# Altium PCB Onboard+Plate+ver1 (altium designer.).pcbdoc
Units mm, origin at the board's own origin, x right, y up, seen from the top; angles counter-clockwise.
Board outline 102.36 x 175.4 mm, 2 copper layers (Top Layer, Bottom Layer); 19 components, 31 nets, 98 pads, 0 vias.
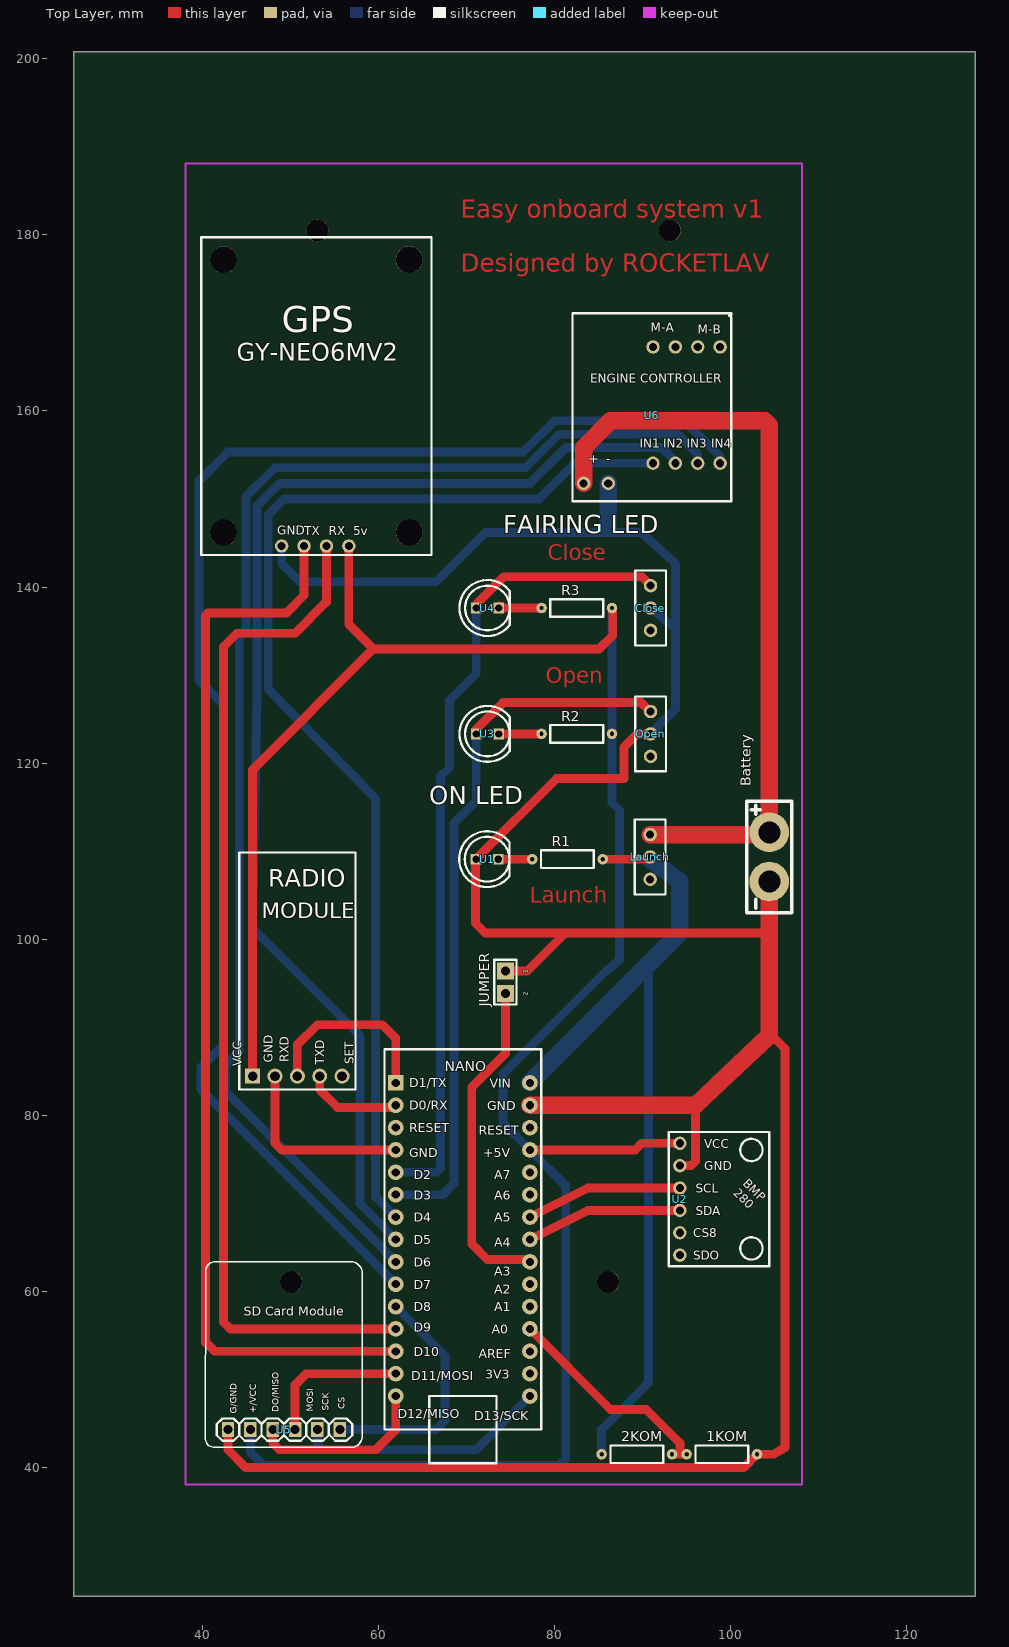
[diagram p0: Top Layer view]
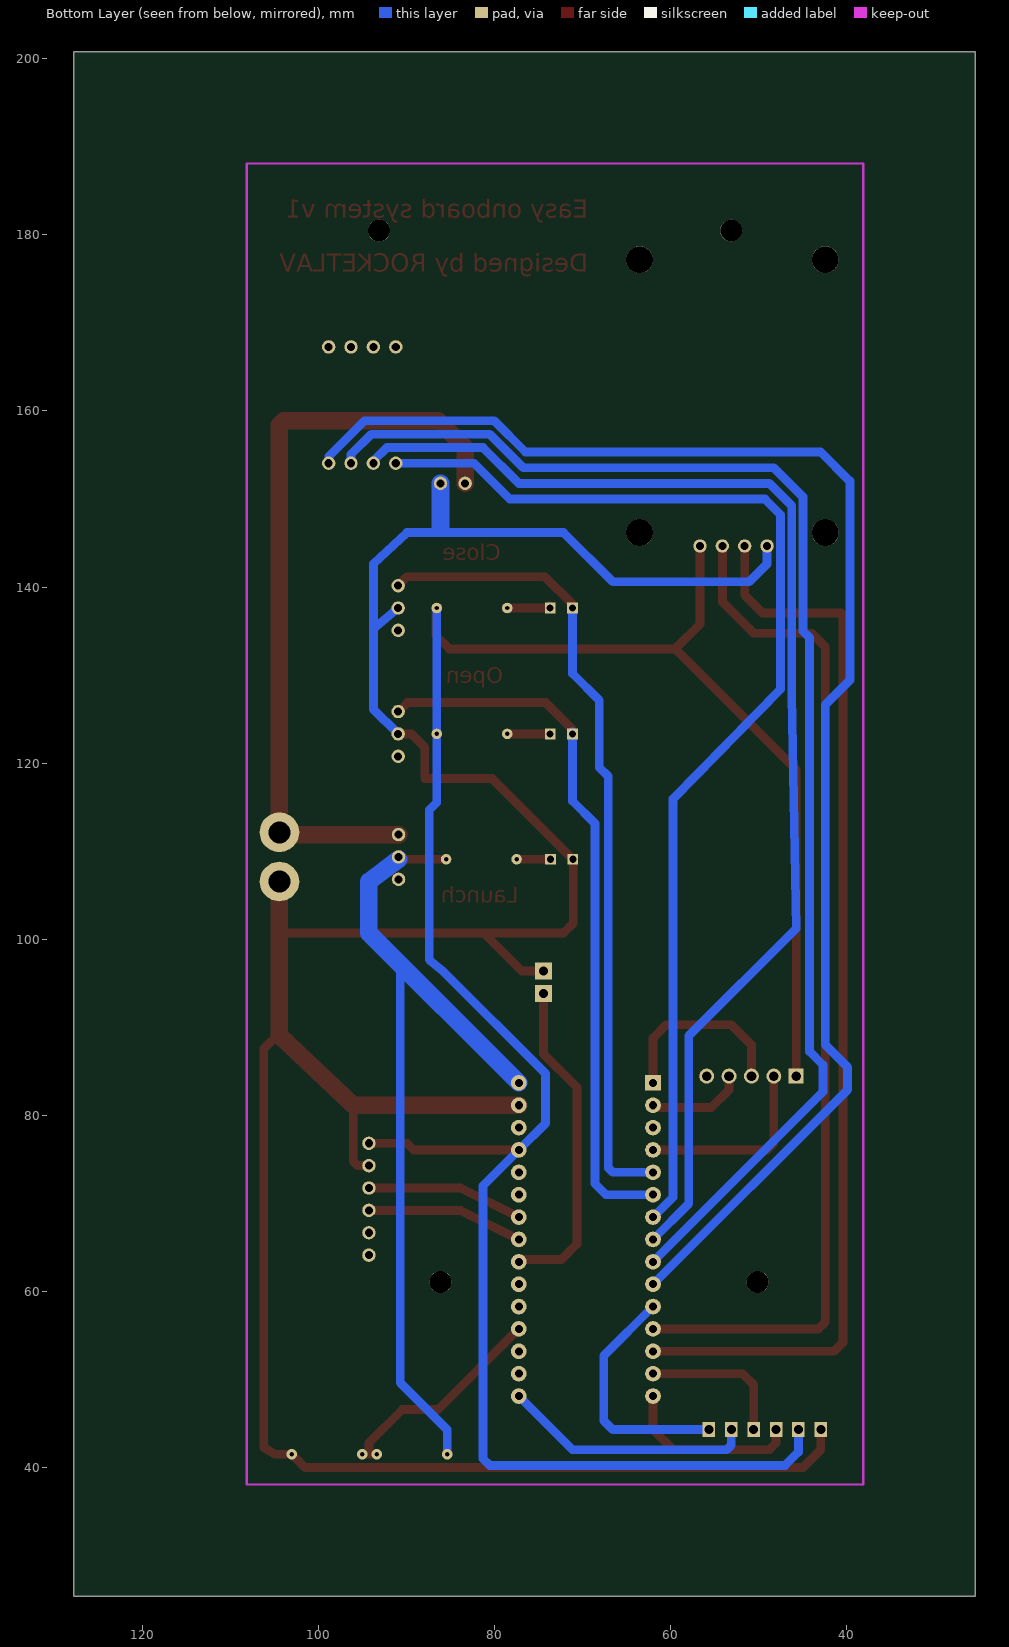
[diagram p1: Bottom Layer view, seen from below]

## Layer stack, top to bottom
Top Layer: signal copper (thickness not stored)
Dielectric: dielectric 0.32, FR-4, Dk 4.8
Bottom Layer: signal copper (thickness not stored)

## Board outline
127.762,25.4 25.4,25.4 25.4,200.8 127.762,200.8

## Components (designator, comment, footprint, x,y, rotation, side; value= is the part's Value field where it differs from the comment)
1KOM "_" ?#1 99.06,41.542 r0 top
2KOM "_" ?#1 89.408,41.542 r0 top
Battery "_" ?#2 106.934,115.71 r270 top
Close "_" ?#3 90.912,137.624 r0 top
GPS "GY_NEO6MV2_PACKAGE" GY_NEO6MV2_PACKAGE 52.832,161.938 r90 top
JUMPER "JUMPER2" JUMPER2 74.422,93.866 r90 top
Launch "_" ?#3 90.868,109.359 r0 top
NANO "ARDUINO_NANO" ARDUINO_NANO 69.596,65.926 r0 top
Open "_" ?#3 90.912,123.329 r0 top
R1 "_" ?#1 81.534,109.106 r0 top
R2 "_" ?#1 82.593,123.33 r0 top
R3 "_" ?#1 82.593,137.625 r0 top
RADIO "HC12" HC12 45.72,84.468 r90 top
U1 "LED-5MM" LED-5MM 72.348,109.106 r0 top
U2 "_" ?#4 104.394,78.118 r180 top
U3 "LED-5MM" LED-5MM 72.391,123.33 r0 top
U4 "LED-5MM" LED-5MM 72.391,137.625 r0 top
U5 "_" ?#5 58.166,42.304 r90 top
U6 "MX1508" MX1508 100.076,163.208 r270 top

## Footprints (in the part's own frame and the unit in brackets; to place one, negate y for a bottom-side part, rotate by r counter-clockwise, add the part's x,y. Pads: shape width x height; smd on the part's side, far side on the other; paste and mask are expansions set on the pad)
ARDUINO_NANO [mil]
  rect 70x70 hole 36: 1(-300,700)
  round 70 hole 36: 2(-300,600) 3(-300,500) 4(-300,400) 5(-300,300) 6(-300,200) 7(-300,100) 8(-300,0) 9(-300,-100) 10(-300,-200) 11(-300,-300) 12(-300,-400) 13(-300,-500) 14(-300,-600) 15(-300,-700) 16(300,-700) 17(300,-600) 18(300,-500) 19(300,-400) 20(300,-300) 21(300,-200) 22(300,-100) 23(300,0) 24(300,100) 25(300,200) 26(300,300) 27(300,400) 28(300,500) 29(300,600) 30(300,700)
  silkscreen extent -350,-1000 350,850
GY_NEO6MV2_PACKAGE [mil]
  round 60 hole 36: 1(-680,150) 2(-680,50) 3(-680,-50) 4(-680,-150)
  round 120 hole 120 unplated: ""(-620,-420) ""(-620,410) ""(600,-420) ""(600,410)
  silkscreen extent -720,-520 700,510
HC12 [mm]
  rect 1.7x1.7 hole 1.1: 1(0,0)
  round 1.7 hole 1.1: 2(0,-2.54) 3(0,-5.08) 4(0,-7.62) 5(0,-10.16)
  silkscreen extent -1.52,-11.68 25.4,1.52
JUMPER2 [mil]
  rect 76x76 hole 39.4: 1(100,0) 2(0,0)
  silkscreen extent -50,-50 150,50
LED-5MM [mil]
  rect 47.7x47.7 hole 32: 1(-50,-0.05) 2(50,-0.05)
  silkscreen extent -125,-125 100,125
MX1508 [mil]
  round 60 hole 36: 1(-160,-350) 2(-160,-250) 3(-160,-150) 4(-160,-50) 5(360,-350) 6(360,-250) 7(360,-150) 8(360,-50) 9(450,-660) 10(450,-550)
  silkscreen extent -310,-710 530,0
?#1 [mm]
  round 1.199 hole 0.5: 1(-4.064,0) 2(3.937,0)
  silkscreen extent -3.06,-1 2.94,1
?#2 [mm]
  round 4.5 hole 2.5: 1(3.556,-2.54) 2(9.144,-2.54)
  silkscreen extent 0,-5.08 12.7,0
?#3 [mm]
  round 1.524 hole 0.914: 1(0,2.541) 2(0,0.001) 3(0,-2.539)
  silkscreen extent -1.75,-4.25 1.75,4.25
?#4 [mm]
  round 1.524 hole 0.914: 1(10.16,13.97) 2(10.16,11.43) 3(10.16,8.89) 4(10.16,6.35) 5(10.16,3.81) 6(10.16,1.27)
  silkscreen extent 0,0 11.43,15.24
?#5 [mm]
  rect 1.699x1.415 hole 1.016: 1(2.032,15.24) 2(2.032,12.7) 3(2.032,10.16) 4(2.032,7.62) 5(2.032,5.08) 6(2.032,2.54)
  Bottom Layer lines w0.406: 2.032,5.08 1.905,4.953
  silkscreen extent 0,0 21.08,17.84

## Free pads (board coordinates)
  round 2.5 hole 2.5 unplated: ""(50.099,61.1) ""(53.086,180.48) ""(86.101,61.1) ""(93.086,180.48)

## Nets (pads, with @x,y where several pads share a name; then routed paths per layer and width w, separated by ;. In a path a pad name is that pad's centre, name@x,y a point inside that pad or via, vN(x,y) a via of type N, cw(c..) or ccw(c..) an arc to the next point about the centre after c; other vN are vias at no path point)
CLK: NANO.15 U5.3 | length 20.6
  Top Layer w1: U5.3 48.006,42.812 48.768,42.05 59.69,42.05 61.976,44.336 NANO.15
CS: NANO.16 U5.5 | length 28.6
  Bottom Layer w1: U5.5 53.086,42.558 53.594,42.05 71.12,42.05 NANO.16
MISO: 1KOM.1 1KOM.2 2KOM.1 2KOM.2 Battery.1 Close.1 Close.2 GPS.1 GPS.4 JUMPER.1 Launch.1 Launch.2 NANO.5 NANO.6 NANO.19 NANO.25 NANO.26 NANO.27 NANO.30 Open.1 Open.2 R1.1 R1.2 R2.1 R2.2 R3.1 R3.2 RADIO.1 U1.1 U1.2 U2.6 U3.1 U3.2 U4.1 U4.2 U5.1 U5.2 U6.9 U6.10 | length 853.2
  Top Layer w1: U5.1 42.926,42.05 44.958,40.018 101.473,40.018 1KOM.2 ; RADIO.1 45.72,119.266 59.436,132.982 ; 56.642,140.856 56.642,135.776 59.436,132.982 ; U1.1@71.036,109.106 71.036,101.824 72.136,100.724 104.394,100.731 ; U1.1@71.079,109.106 80.223,118.25 87.884,118.25 87.884,121.806 89.408,123.33 Open.2@90.868,123.33 ; U3.1@71.079,123.584 71.079,123.797 74.168,126.886 89.852,126.886 Open.1@90.868,125.87 ; U4.1@71.166,137.879 71.166,138.092 74.254,141.181 89.939,141.181 Close.1@90.955,140.165 ; U1.2@73.576,109.106 R1.1 ; U3.2@73.663,123.33 R2.1 ; U4.2@73.706,137.879 73.96,137.625 R3.1@78.572,137.625 ; JUMPER.1 76.891,96.406 81.209,100.724 ; NANO.27 80.518,76.086 ; R3.2 86.614,137.541 86.614,134.506 85.09,132.982 59.436,132.982 ; 2KOM.2@93.472,41.542 1KOM.1 ; 1KOM.2@102.87,41.542 104.902,41.542 106.172,42.304 106.172,87.577 104.394,89.355
  Top Layer w2: U6.9 83.312,155.842 86.36,158.89 103.886,158.89 104.394,158.382 Battery.1 104.14,111.9 Launch.1 ; 96.012,81.166 104.394,89.101 104.394,106.566
  Bottom Layer w1: U5.2 45.466,41.796 46.99,40.272 80.518,40.272 81.28,41.034 81.28,72.022 NANO.27 74.168,79.134 74.168,84.722 85.852,96.406 87.376,97.676 87.376,114.694 86.53,115.54 R2.2 R3.2 ; NANO.6 67.31,71.006 68.58,72.276 68.58,113.17 71.123,115.71 U3.1@71.123,123.584 ; NANO.5 66.548,73.546 67.056,74.054 67.056,118.504 68.072,119.52 68.072,127.14 71.12,130.188 U4.1@71.12,137.625 ; 2KOM.1 85.344,44.336 90.678,49.67 90.678,97.168 90.757,97.246 ; Open.2 93.726,126.144 93.726,135.268 Close.2
  Bottom Layer w2: NANO.30 94.234,100.724 94.234,106.566 Launch.2@90.868,109.106 ; 86.106,146.952 86.106,146.698 U6.10
MOSI: NANO.14 U5.4 | length 17
  Top Layer w1: U5.4 50.546,49.416 51.816,50.686 NANO.14
S$8: 
S$10: 
S$39: 
S$899: NANO.17
S$1100: Battery.2 NANO.29 U2.5
S$1102: NANO.24 U2.4
S$1104: NANO.23 U2.3
S$1293: NANO.20
S$1557: JUMPER.2 NANO.3 NANO.22 | length 37.5
  Top Layer w1: JUMPER.2 74.422,87.008 70.612,83.198 70.612,65.418 72.39,63.64 76.962,63.64 NANO.22
S$2214: GPS.2 NANO.13 | length 118.5
  Top Layer w1: 51.562,140.856 51.562,139.078 49.53,137.046 40.64,137.046 40.386,136.792 40.386,54.242 41.402,53.226 NANO.13
S$2217: GPS.3 NANO.12 | length 112.9
  Top Layer w1: 54.102,140.856 54.102,138.316 50.546,134.76 43.942,134.76 42.418,133.236 42.418,56.528 43.18,55.766 NANO.12
S$2229: NANO.1 RADIO.3 | length 21.4
  Top Layer w1: RADIO.3 50.8,88.024 53.086,90.31 60.452,90.31 61.976,88.786 NANO.1
S$2231: NANO.2 RADIO.4 | length 11.1
  Top Layer w1: RADIO.4 53.34,82.944 55.372,80.912 61.722,80.912 NANO.2
S$2233: NANO.4 RADIO.2 | length 21.7
  Top Layer w1: RADIO.2 48.26,76.848 49.022,76.086 NANO.4
S$2242: NANO.7 NANO.11 U5.6 | length 93.5
  Bottom Layer w1: 47.498,128.41 59.69,115.964 59.69,70.752 NANO.7 ; U5.6 66.548,44.336 67.564,45.352 67.564,52.718 NANO.11
S$2255: NANO.8 | length 68.5
  Bottom Layer w1: 46.228,127.648 45.72,101.232 57.912,89.04 57.912,69.99 NANO.8
S$2271: NANO.9 | length 72.6
  Bottom Layer w1: 44.196,126.378 44.196,126.886 44.196,87.262 42.672,85.738 42.672,82.69 NANO.9
S$2276: NANO.10 | length 76
  Bottom Layer w1: 42.418,126.632 42.418,88.024 39.878,85.484 39.878,82.944 NANO.10
S$2479:  | length 3.8
  Top Layer w1: 51.562,140.856 51.562,144.666
S$2481:  | length 4.3
  Top Layer w1: 54.102,140.348 54.102,144.666
S$2483:  | length 3.8
  Top Layer w1: 56.642,140.856 56.642,144.666
S$2487:  | length 58.9
  Bottom Layer w1: 49.022,144.666 49.022,142.634 51.054,140.602 66.548,140.602 72.136,146.19 89.916,146.19 93.726,142.634 93.726,135.014
S$2646:  | length 65.9
  Bottom Layer w1: 47.498,128.41 47.498,148.222 49.276,150 78.232,150 82.296,154.064 91.186,154.064
S$2650:  | length 74
  Bottom Layer w1: 46.228,126.378 46.228,149.238 48.768,151.778 77.216,151.778 81.28,155.842 92.202,155.842 93.726,154.318 93.726,154.064
S$2653:  | length 79.6
  Bottom Layer w1: 44.196,127.14 44.196,134.252 44.958,135.014 44.958,150.254 48.26,153.556 76.708,153.556 80.518,157.366 93.98,157.366 96.266,155.08 96.266,154.064
S$2656:  | length 91
  Bottom Layer w1: 42.418,126.632 39.624,129.426 39.624,152.032 42.926,155.334 76.454,155.334 80.01,158.89 94.742,158.89 98.806,154.826 98.806,154.064
SQW: 
pads on no net: Close.3 GPS. Launch.3 NANO.18 NANO.21 NANO.28 Open.3 RADIO.5 U2.1 U2.2 U6.1 U6.2 U6.3 U6.4 U6.5 U6.6 U6.7 U6.8
copper on no net: | length 105.6
  Top Layer w1: 77.216,55.766 86.36,46.622 90.424,46.622 94.234,42.812 94.234,41.542 ; 77.216,65.926 83.82,69.228 94.234,69.228 ; 77.216,68.466 83.82,71.768 94.234,71.768 ; 80.518,76.086 89.154,76.086 89.916,76.848 94.234,76.848 ; 85.471,109.106 90.678,109.106 ; 94.234,74.308 95.504,74.308 96.012,74.816 96.012,81.166
  Top Layer w2: 77.216,81.166 96.012,81.166

## Other copper
Top Layer:
  text "Easy onboard system v1 /  / Designed by ROCKETLAV" at 69.342,175.816 h2.03

## Silkscreen, mask and mechanical layers (free items; w line width, h text height)
Top Overlay:
  text "M-A" at 90.932,169.02 h1
  text "M-B" at 96.266,168.766 h1
  text "ENGINE CONTROLLER" at 84.074,163.178 h1
  text "IN2" at 92.357,155.85 h1
  text "IN1" at 89.662,155.812 h1
  text "IN3" at 94.996,155.812 h1
  text "IN4" at 97.79,155.812 h1
  text "+" at 83.983,155.08 h1 r270
  text "-" at 85.852,154.072 h1
  text "FAIRING LED" at 74.168,146.098 h2.03
  text "GND" at 48.514,145.944 h1
  text "TX" at 51.562,145.906 h1
  text "RX" at 54.356,145.906 h1
  text "5v" at 57.15,145.906 h1
  text "ON LED" at 65.786,115.364 h2.03
Mechanical 15:
  lines w0.003: 76.581,113.1 76.581,113.1

## Text inside footprints (layer, text, board x,y; h text height)
GPS: Top Overlay "GY-NEO6MV2" at 43.942,165.688 h2
JUMPER: Top Overlay "2" at 76.962,93.612 h0.51 r90; Top Overlay "1" at 76.962,96.152 h0.51 r90
NANO: Top Overlay "D1/TX" at 63.5,83.221 h1.02; Top Overlay "GND" at 72.39,80.612 h1.02; Top Overlay "+5V" at 71.882,75.278 h1.02; Top Overlay "D12/MISO" at 62.23,45.629 h1.02; Top Overlay "VIN" at 72.644,83.152 h1.02; Top Overlay "D13/SCK" at 70.866,45.375 h1.02; Top Overlay "GND" at 63.5,75.278 h1.02; Top Overlay "D0/RX" at 63.5,80.681 h1.02; Top Overlay "RESET" at 63.5,78.072 h1.02; Top Overlay "D2" at 64.008,72.738 h1.02; Top Overlay "D3" at 64.008,70.452 h1.02; Top Overlay "D4" at 64.008,67.912 h1.02; Top Overlay "D5" at 64.008,65.372 h1.02; Top Overlay "D6" at 64.008,62.832 h1.02; Top Overlay "D7" at 64.008,60.292 h1.02; Top Overlay "D8" at 64.008,57.752 h1.02; Top Overlay "D9" at 64.008,55.466 h1.02; Top Overlay "D10" at 64.008,52.672 h1.02; Top Overlay "D11/MOSI" at 63.754,49.947 h1.02; Top Overlay "3V3" at 72.136,50.132 h1.02; Top Overlay "AREF" at 71.374,52.418 h1.02; Top Overlay "A0" at 72.898,55.212 h1.02; Top Overlay "A1" at 73.152,57.752 h1.02; Top Overlay "A2" at 73.152,59.784 h1.02; Top Overlay "A3" at 73.152,61.816 h1.02; Top Overlay "A4" at 73.152,65.118 h1.02; Top Overlay "A5" at 73.152,67.912 h1.02; Top Overlay "A6" at 73.152,70.452 h1.02; Top Overlay "A7" at 73.152,72.738 h1.02; Top Overlay "RESET" at 71.374,77.818 h1.02
RADIO: Top Overlay "MODULE" at 46.736,102.397 h1.8; Top Overlay "RXD" at 49.814,86.022 h1 r90; Top Overlay "GND" at 48.036,85.976 h1 r90; Top Overlay "TXD" at 53.878,85.768 h1 r90; Top Overlay "VCC" at 44.48,85.588 h1 r90; Top Overlay "SET" at 57.18,85.814 h1 r90
U2: Top Overlay "VCC" at 97.028,76.31 h1; Top Overlay "GND" at 97.028,73.77 h1; Top Overlay "SCL" at 96.012,71.23 h1; Top Overlay "SDA" at 96.012,68.69 h1; Top Overlay "CS8" at 95.758,66.15 h1; Top Overlay "SDO" at 95.758,63.61 h1; Top Overlay "BMP / 280" at 100.23,71.122 h1 r315
U5: Top Overlay "SD Card Module" at 44.704,57.244 h1.02; Top Overlay "SCK" at 54.392,46.454 h0.76 r90; Top Overlay "MOSI" at 52.614,46.375 h0.76 r90; Top Overlay "DO/MISO" at 48.687,46.312 h0.76 r90; Top Overlay "G/GND" at 43.942,46.114 h0.76 r90; Top Overlay "CS" at 56.17,46.66 h0.76 r90; Top Overlay "+/VCC" at 46.147,46.17 h0.76 r90